# Altium PCB PCB_MPPT_V1.0.PcbDoc
Units mm, origin at the board's own origin, x right, y up, seen from the top; angles counter-clockwise.
Board outline 99.06 x 66 mm, 2 copper layers (Top Layer, Bottom Layer); 93 components, 51 nets, 264 pads, 192 vias.
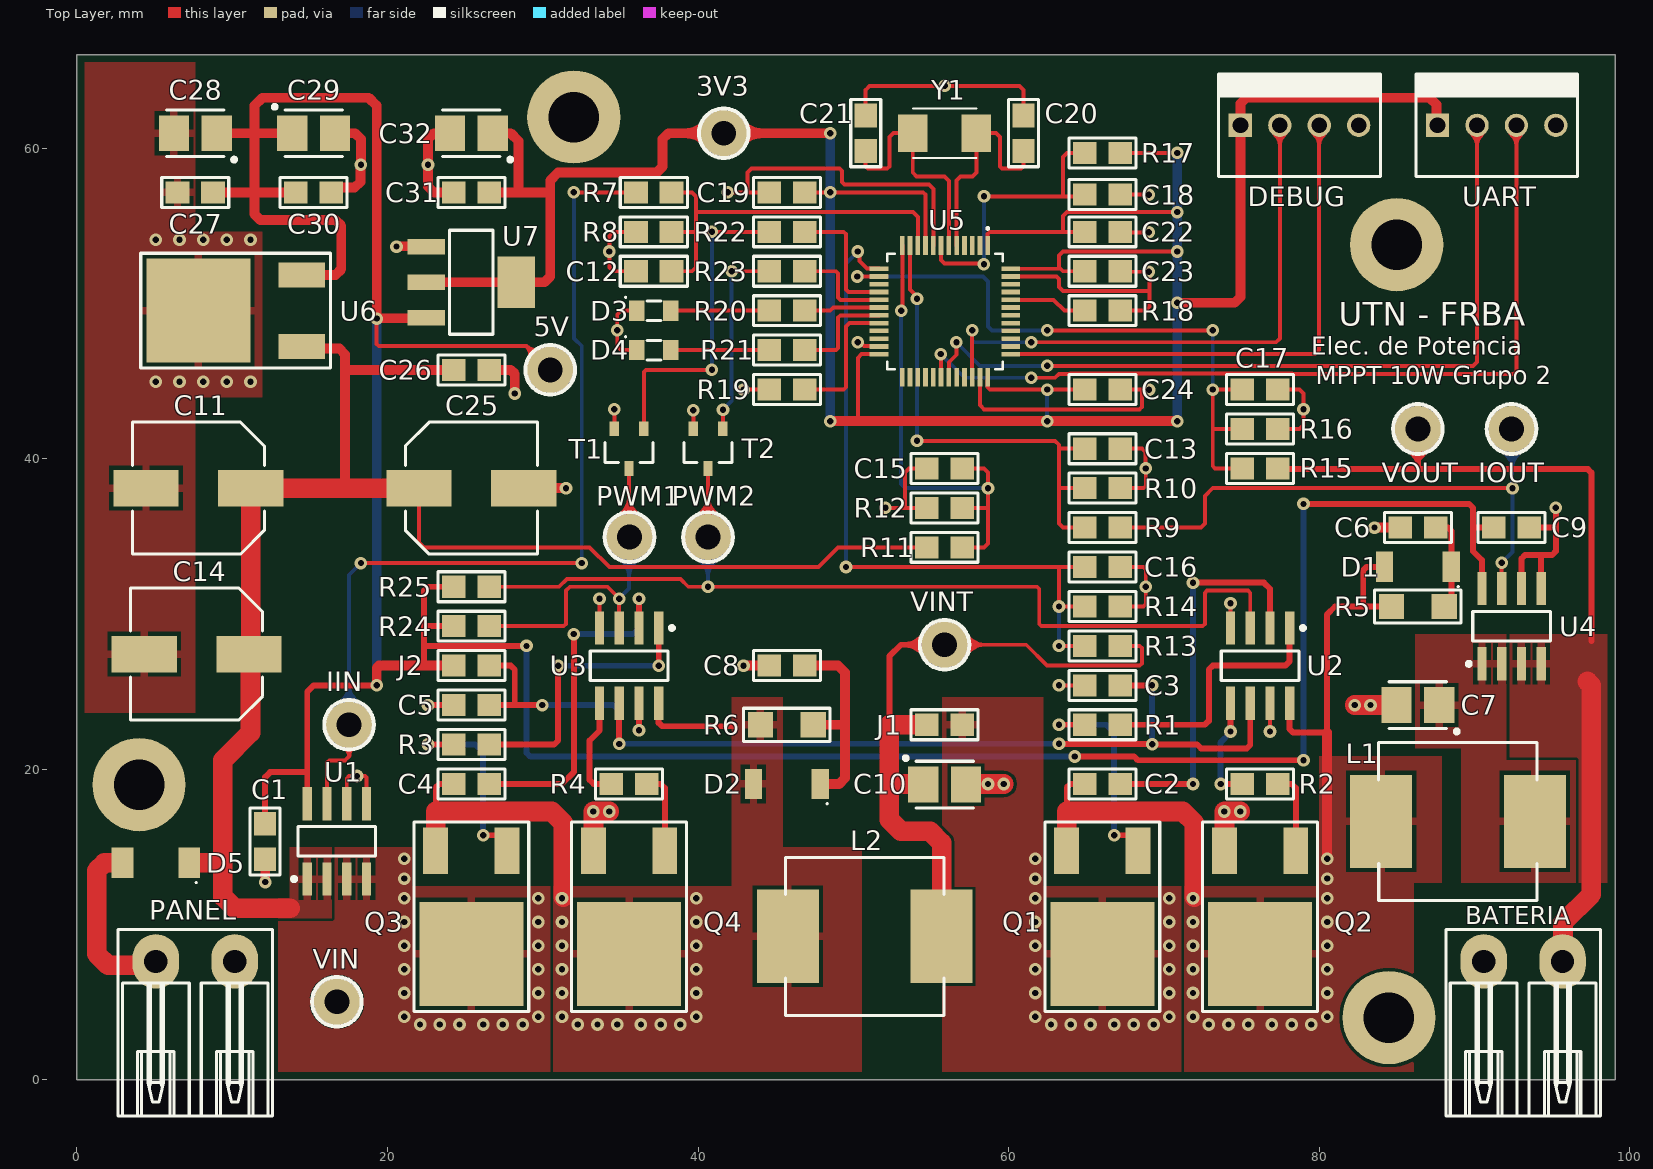
[diagram p0: Top Layer view]
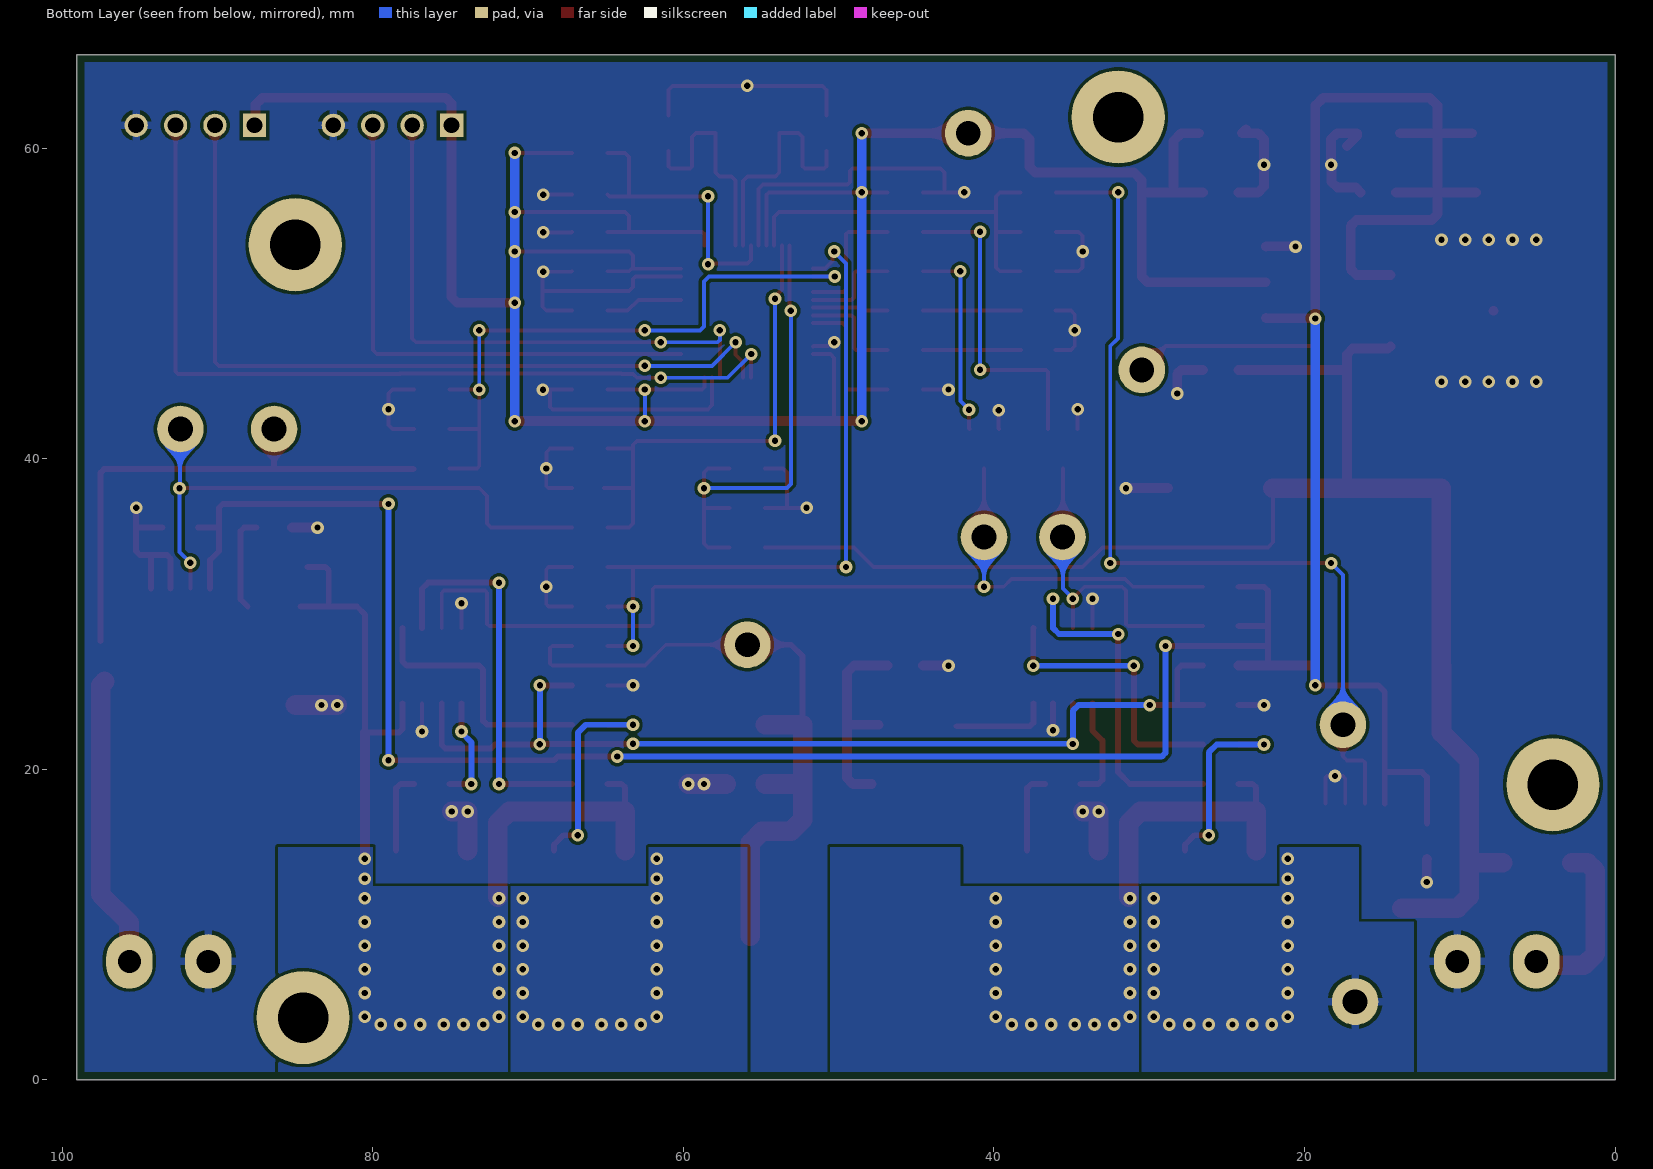
[diagram p1: Bottom Layer view, seen from below]

## Layer stack, top to bottom
Top Solder: solder mask 0.0102, Solder Resist, Dk 3.5
Top Layer: signal copper 0.0356
Dielectric 1: dielectric 0.32, FR-4, Dk 4.8
Bottom Layer: signal copper 0.0356
Bottom Solder: solder mask 0.0102, Solder Resist, Dk 3.5

## Board outline
0,0 0,66 99.06,66 99.06,0

## Design rules (kind name [scope] priority, off if disabled: settings)
Clearance [All] p1: gap=0.203 ignorepadtopadclearanceinfootprint=FALSE except(0: Arc-Hole Track-Hole SMDPad-Hole THPad-Hole Via-Hole Fill-Hole Poly-Hole Region-Hole Text-Hole; 0.178: SMDPad-SMDPad)
HoleSize [All] p1: absolutevalues=TRUE maxlimit=3.81 minlimit=0.254 maxpercent=80.000 minpercent=20.000
MinimumSolderMaskSliver [All] p1: minsoldermaskwidth=0.178
PolygonConnect [All] p1: connectstyle=Relief reliefconductorwidth=0.508 reliefentries=4 polygonreliefangle="90 Angle" airgapwidth=0.254
RoutingVias [All] p1: holewidth=0.406 width=0.813 viastyle="Through Hole" minholewidth=0.406 minwidth=0.813 maxholewidth=0.406 maxwidth=0.813
SilkToSilkClearance [All] p1: silktosilkclearance=0.127
SilkToSolderMaskClearance [IsPad] p1: minsilkscreentomaskgap=0 clearancetoexposedcopper=TRUE
SolderMaskExpansion [All] p1: expansion=0.102 istentingtop=FALSE
Width [All] p1: maxlimit=2.54 minlimit=0.203 preferedwidth=0.381
26 further rules are at their usual default settings.

## Classes and differential pairs
component class Designator: C18 C19 C20 C21 C22 C23 C24 D3 D4 DEBUG PWM1 PWM2 R17 R18 R19 R20 R21 R22 R23 R24 R25 T1 T2 U5 UART Y1

## Components (designator, comment, footprint, x,y, rotation, side; value= is the part's Value field where it differs from the comment)
3V3 "TP" TP_COMPACT 41.656,60.96 r0 top (schematic designator TP9)
5V "TP" TP_COMPACT 30.48,45.72 r0 top (schematic designator TP8)
BATERIA "CONN_02P" Bornera2_DegsonH 93.143,7.62 r0 top (schematic designator CN2)
C1 "100nF 50V X7R" 0805 12.121,15.349 r270 top
C2 "100nF 50V X7R" 0805 66.04,19.05 r0 top
C3 "100nF 50V X7R" 0805 66.04,25.4 r0 top
C4 "100nF 50V X7R" 0805 25.4,19.05 r0 top
C5 "100nF 50V X7R" 0805 25.4,24.13 r0 top
C6 "8.2nF 50V X7R" 0805 86.36,35.56 r180 top
C7 "10uF 35V Tantalio" CAPPOL1210 86.36,24.13 r180 top
C8 "8.2nF 50V X7R" 0805 45.72,26.67 r180 top
C9 "100nF 50V X7R" 0805 92.396,35.56 r0 top
C10 "10uF 35V Tantalio" CAPPOL1210 55.88,19.01 r0 top
C11 "100uF 50V Alum" CAPSMD8x8.3 7.822,38.1 r180 top
C12 "1nF 25V X7R" 0805 37.151,52.07 r180 top
C13 "1nF 25V X7R" 0805 66.04,40.64 r0 top
C14 "100uF 50V Alum" CAPSMD8x8.3 7.705,27.415 r180 top
C15 "1nF 25V X7R" 0805 55.88,39.37 r180 top
C16 "1nF 25V X7R" 0805 66.04,33.02 r0 top
C17 "1nF 25V X7R" 0805 76.2,44.45 r0 top
C18 "100nF 50V X7R" 0805 66.04,57.023 r180 top
C19 "100nF 50V X7R" 0805 45.72,57.15 r0 top
C20 "22pF 50V C0G/NP0" 0805 60.96,60.96 r90 top
C21 "22pF 50V C0G/NP0" 0805 50.8,60.96 r90 top
C22 "100nF 50V X7R" 0805 66.04,54.61 r180 top
C23 "100nF 50V X7R" 0805 66.04,52.07 r180 top
C24 "100nF 50V X7R" 0805 66.04,44.45 r180 top
C25 "100uF 50V Alum" CAPSMD8x8.3 25.4,38.1 r0 top
C26 "100nF 50V X7R" 0805 25.4,45.72 r0 top
C27 "100nF 50V X7R" 0805 7.62,57.15 r180 top
C28 "10uF 35V Tantalio" CAPPOL1210 7.62,60.96 r180 top
C29 "10uF 35V Tantalio" CAPPOL1210 15.24,60.96 r0 top
C30 "100nF 50V X7R" 0805 15.24,57.15 r180 top
C31 "100nF 50V X7R" 0805 25.4,57.15 r180 top
C32 "10uF 35V Tantalio" CAPPOL1210 25.4,60.96 r180 top
D1 "PMEG3050EP" SOD-128#1 86.36,33.033 r180 top
D2 "PMEG3050EP" SOD-128#1 45.72,19.05 r180 top
D3 "VERDE 0805" LED0805 37.151,49.53 r0 top
D4 "ROJO 0805" LED0805 37.151,46.99 r0 top
D5 "PMEG3050EP" SOD-128#2 5.08,13.97 r180 top
DEBUG "CONN_04P" "MOLEX4 - 0.1\"" 74.93,61.468 r0 top (schematic designator CN3)
IIN "TP" TP_COMPACT 17.526,22.86 r0 top (schematic designator TP1)
IOUT "TP" TP_COMPACT 92.396,41.91 r0 top (schematic designator TP5)
J1 "JUMPER" 0805 55.88,22.86 r180 top
J2 "JUMPER" 0805 25.4,26.67 r0 top
L1 "SRP1050WA-101M" SRP1050WA 88.944,16.637 r0 top
L2 "SRP1050WA-101M" SRP1050WA 50.742,9.239 r0 top
PANEL "CONN_02P" Bornera2_DegsonH 7.62,7.62 r0 top (schematic designator CN1)
PWM1 "TP" TP_COMPACT 35.587,34.952 r0 top (schematic designator TP6)
PWM2 "TP" TP_COMPACT 40.64,34.952 r0 top (schematic designator TP7)
Q1 "IRLML0040TRPBF" dpak 66.04,11.43 r180 top
Q2 "IRLML0040TRPBF" dpak 76.2,11.43 r180 top
Q3 "IRLML0040TRPBF" dpak 25.4,11.43 r180 top
Q4 "IRLML0040TRPBF" dpak 35.56,11.43 r180 top
R1 "22R 5% 1/8W" 0805 66.04,22.86 r0 top
R2 "22R 5% 1/8W" 0805 76.2,19.05 r180 top
R3 "22R 5% 1/8W" 0805 25.4,21.59 r0 top
R4 "22R 5% 1/8W" 0805 35.56,19.05 r180 top
R5 "33 5% 1/2W" 1206 86.36,30.48 r180 top
R6 "33 5% 1/2W" 1206 45.72,22.86 r180 top
R7 "10K 1% 1/8W" 0805 37.151,57.15 r180 top
R8 "10K 1% 1/8W" 0805 37.151,54.61 r0 top
R9 "10K 1% 1/8W" 0805 66.04,35.56 r0 top
R10 "10K 1% 1/8W" 0805 66.04,38.1 r180 top
R11 "68K 1% 1/8W" 0805 55.88,34.29 r180 top
R12 "10K 1% 1/8W" 0805 55.88,36.83 r0 top
R13 "68K 1% 1/8W" 0805 66.04,27.94 r0 top
R14 "10K 1% 1/8W" 0805 66.04,30.48 r180 top
R15 "10K 1% 1/8W" 0805 76.2,39.37 r0 top
R16 "10K 1% 1/8W" 0805 76.2,41.91 r180 top
R17 "10K 1% 1/8W" 0805 66.04,59.69 r0 top
R18 "10K 1% 1/8W" 0805 66.04,49.53 r180 top
R19 "10K 1% 1/8W" 0805 45.72,44.45 r180 top
R20 "330R 5% 1/8W" 0805 45.72,49.53 r180 top
R21 "330R 5% 1/8W" 0805 45.72,46.99 r180 top
R22 "10K 1% 1/8W" 0805 45.72,54.61 r180 top
R23 "10K 1% 1/8W" 0805 45.72,52.07 r180 top
R24 "10K 1% 1/8W" 0805 25.4,29.21 r180 top
R25 "10K 1% 1/8W" 0805 25.4,31.75 r180 top
T1 "BC817" SOT23 36.51,41.92 r180 top
T2 "BC817" SOT23 41.59,41.92 r180 top
U1 "TMCS1108A4BQDR" SO8 16.74,15.349 r90 top
U2 "MCP14628" SO8 76.2,26.67 r270 top
U3 "MCP14628" SO8 35.56,26.67 r270 top
U4 "TMCS1108A4BQDR" SO8 92.396,29.21 r90 top
U5 "STM32F103" "LQFP48 - 7x7" 55.88,49.53 r270 top
U6 "MC7805CDTRKG" dpak 11.147,49.53 r90 top
U7 "SPX1117M3-L-3-3/TR" SOT223 25.4,51.36 r270 top
UART "CONN_04P" "MOLEX4 - 0.1\"" 87.63,61.468 r0 top (schematic designator CN4)
VIN "TP" TP_COMPACT 16.74,5.023 r0 top (schematic designator TP2)
VINT "TP" TP_COMPACT 55.88,28.015 r0 top (schematic designator TP4)
VOUT "TP" TP_COMPACT 86.36,41.91 r0 top (schematic designator TP3)
Y1 "ECS-80-12-30Q-DS-TR" "ECS 2-SMD" 55.88,60.96 r0 top

## Footprints (in the part's own frame and the unit in brackets; to place one, negate y for a bottom-side part, rotate by r counter-clockwise, add the part's x,y. Pads: shape width x height; smd on the part's side, far side on the other; paste and mask are expansions set on the pad)
0805 [mil] "Pasivo 0805"
  rect 60x56 smd: 1(-45,0) 2(45,0)
  silkscreen extent -85,-38 85,38, body extent -39,-24 39,25, height 15
1206 [mil] "Pasivo 1206"
  rect 64x64 smd: 1(-67,0) 2(67,0)
  silkscreen extent -109,-42 110,42, body extent -62,-31 63,31, height 20
Bornera2_DegsonH [mm]
  oval 3x3.5 hole 1.5: 1(-2.54,0) 2(2.54,0)
  silkscreen extent -4.98,-9.95 4.98,2.05, body extent -5.08,-10.3 5.08,1.8, height 8.2
CAPPOL1210 [mm] "Molded Capacitor, 2-Leads, Body 3,50x2,85mm, IPC Medium Density"
  rect 1.95x2.3 smd: 1(-1.375,0) 2(1.375,0)
  silkscreen extent -2.63,-1.5 1.85,1.82, body extent -1.85,-1.5 1.85,1.5, height 2.1
CAPSMD8x8.3 [mm] "Aluminum Electrolytic Capacitor, Body 8,30x8,30x10,00mm, IPC Low Density"
  rect 4.2x2.35 smd: 1(-3.375,0) 2(3.375,0)
  silkscreen extent -4.25,-4.25 4.25,4.25, body extent -4.35,-4.25 4.35,4.25, height 10
dpak [mm]
  rect 1.6x3 smd: 1(-2.3,-3.325) 3(2.3,-3.325)
  rect 6.7x6.7 smd: 2(0,3.325)
  silkscreen extent -3.7,-5.18 3.7,7.04, body extent -3.28,-4.18 3.26,5.76, height 2.36
"ECS 2-SMD" [mm]
  rect 1.9x2.4 smd: 1(-2.05,0) 2(2.05,0)
  silkscreen extent -2.05,-1.6 2.05,1.6
LED0805 [mm]
  rect 1x1.3 smd: A(1.1,0) K(-1.1,0)
  silkscreen extent -1.86,-0.63 0.45,0.91, body extent -1.1,-0.65 1.1,0.65, height 1
"LQFP48 - 7x7" [mil]
  rect 47x12 smd paste+0 mask+0: 1(-165.32,109.27) 2(-165.32,89.58) 3(-165.32,69.9) 4(-165.32,50.21) 5(-165.32,30.53) 6(-165.32,10.84) 7(-165.32,-8.84) 8(-165.32,-28.53) 9(-165.32,-48.21) 10(-165.32,-67.9) 11(-165.32,-87.58) 12(-165.32,-107.27) 25(169.32,-107.27) 26(169.32,-87.58) 27(169.32,-67.9) 28(169.32,-48.21) 29(169.32,-28.53) 30(169.32,-8.84) 31(169.32,10.84) 32(169.32,30.53) 33(169.32,50.21) 34(169.32,69.9) 35(169.32,89.58) 36(169.32,109.27)
  rect 12x47 smd paste+0 mask+0: 13(-106.27,-166.32) 14(-86.58,-166.32) 15(-66.9,-166.32) 16(-47.21,-166.32) 17(-27.53,-166.32) 18(-7.84,-166.32) 19(11.84,-166.32) 20(31.53,-166.32) 21(51.21,-166.32) 22(70.9,-166.32) 23(90.58,-166.32) 24(110.27,-166.32) 37(110.27,168.32) 38(90.58,168.32) 39(70.9,168.32) 40(51.21,168.32) 41(31.53,168.32) 42(11.84,168.32) 43(-7.84,168.32) 44(-27.53,168.32) 45(-47.21,168.32) 46(-66.9,168.32) 47(-86.58,168.32) 48(-106.27,168.32)
  silkscreen extent -212,-146 149,148, body extent -175,-176 179,178, height 28
"MOLEX4 - 0.1\"" [mm]
  rect 1.5x1.5 hole 1.016: 1(0,0)
  round 1.5 hole 1.016: 2(2.54,0) 3(5.08,0) 4(7.62,0)
  silkscreen extent -1.4,-3.3 9.02,3.3, body extent -1.27,-3.17 8.89,3.18, height 10.74
SO8 [mm]
  rect 2.15x0.6 smd: 1(-2.425,1.905) 2(-2.425,0.635) 3(-2.425,-0.635) 4(-2.425,-1.905) 5(2.425,-1.905) 6(2.425,-0.635) 7(2.425,0.635) 8(2.425,1.905)
  silkscreen extent -2.55,-2.5 0.95,2.88, body extent -3.01,-2.51 3.01,2.49, height 1.75
SOD-128#1 [mm] "SODFL, 2-Leads, Body 2,50x4,70mm, IPC Medium Density"
  rect 1.1x1.95 smd: 1(2.15,0) 2(-2.15,0)
  silkscreen extent -2.65,1.23 -2.55,1.32, body extent -2.35,-1.35 2.35,1.35, height 1.1
SOD-128#2 [mm] "SODFL, 2-Leads, Body 2,50x4,70mm, IPC Medium Density"
  rect 1.4x1.95 smd: 1(2.15,0) 2(-2.15,0)
  silkscreen extent -2.65,1.23 -2.55,1.32, body extent -2.35,-1.35 2.35,1.35, height 1.1
SOT23 [mm]
  rect 0.6x0.95 smd: 1(0,0) 2(0.95,2.55) 3(1.9,0)
  silkscreen extent -0.6,0.87 2.5,2.17, body extent -0.53,-0.25 2.47,2.88, height 1
SOT223 [mm] "SOT223"
  rect 1x2.4 smd: 1(-2.3,-2.9) 2(0,-2.9) 3(2.3,-2.9)
  rect 3.3x2.4 smd: 4(0,2.9)
  silkscreen extent -3.35,-1.4 3.35,1.4, body extent -3.25,-3.45 3.25,3.55, height 1.62
SRP1050WA [mm]
  rect 4x6 smd: 1(-4.95,0) 2(4.95,0)
  silkscreen extent -5.11,-5.1 5.1,5.08, body extent -5.5,-5 5.5,5, height 5.4
TP_COMPACT [mm] "Keystone 5006 type Testpoint"
  round 3 hole 1.6: 1(0,0)
  silkscreen extent -1.6,-1.6 1.6,1.6, body extent -1.59,-1.59 1.59,1.59, height 5.58

## Part data
BATERIA PANEL: "Connector Generic 2 Vias"
C1 C2 C3 C4 C5 C9 C18 C19 C20 C21 C22 C23 C24 C26 C27 C30 C31: library part CAP
C6 C8 C12 C13 C15 C16 C17: library part "Ceramic capacitor", "Ceramic Capacitor"
C7 C10 C28 C29 C32: library part CAPPOL, "TCJB106M035R0200"
C11 C14 C25: library part CAPPOL, "UWZ1H101MCL1GS"
D1 D2 D5: library part DIODO_SH, "Diode Shottky"
D3 D4: library part Led
DEBUG UART: "Connector Generic 4 Vias"
L1 L2: library part IND, "Inductor"
Q1 Q2 Q3 Q4: library part N_MOSFET_SOT23, "Mosfet N-Ch"
R1 R2 R3 R4 R5 R6: library part Res1, "Resistor"
R7 R8 R9 R10 R11 R12 R13 R14 R15 R16 R17 R18 R19 R20 R21 R22 R23 R24 R25: library part RES
T1 T2: library part "TRANSISTOR NPN"
U1 U4: library part TMCS1108, Supplier Part Number 1=296-TMCS1108A4BQDRCT-ND, Supplier 1=Digi-Key
U6: library part LM78XX
U7: library part LIN_REG
Y1: library part CRISTAL

## Free pads (board coordinates)
  round 6 hole 3.25 unplated: ""(4,19) ""(32,62) ""(84.5,4) ""(85,53.778)

## Via types
v1: diameter 0.813, hole 0.406, Top Layer to Bottom Layer, tented both sides, 192 vias

## Nets (pads, with @x,y where several pads share a name; then routed paths per layer and width w, separated by ;. In a path a pad name is that pad's centre, name@x,y a point inside that pad or via, vN(x,y) a via of type N, cw(c..) or ccw(c..) an arc to the next point about the centre after c; other vN are vias at no path point)
3V3: 3V3.1 C19.2 C22.2 C23.2 C24.2 C31.1 C32.1 DEBUG.1 R17.2 U5.1 U5.9 U5.24 U5.36 U5.48 U7.2 U7.4 UART.1 | length 190.9
  Top Layer w0.254: C19.2 v1(48.514,57.15) 54.507,57.15 54.655,57.001 U5.9 ; 50.292,42.418 50.292,46.482 50.539,46.729 U5.24 ; U5.36 58.655,44.599 58.804,44.45 v1(62.484,44.45) C24.2 ; U5.1 58.655,54.461 58.804,54.61 63.5,54.61 ; U5.48 63.246,52.229 ; C23.2 63.5,52.07 63.341,52.229 63.246,52.229 ; C22.2 63.5,54.61 ; R17.2 v1(70.866,59.69) ; v1(70.866,53.34) 63.5,53.34 63.246,53.086 63.246,52.229 ; v1(70.866,55.88) 63.754,55.88 63.5,55.626 63.5,54.61
  Top Layer w0.635: U7.2 U7.4 30.108,51.36 30.48,51.732 30.48,57.15 ; C31.1 28.448,57.15 ; C32.1 27.94,60.96 28.448,60.452 28.448,57.15 ; 3V3.1@41.469,60.96 38.1,60.96 37.719,60.579 37.719,58.801 37.338,58.42 30.988,58.42 30.48,57.912 30.48,57.15 ; 3V3.1@41.977,60.96 v1(48.514,60.96) ; v1(48.514,42.418) 50.292,42.418 v1(62.484,42.418) v1(70.866,42.418) ; v1(70.866,50.038) 74.558,50.038 74.744,50.224 74.93,50.41 74.93,62.874 75.302,63.246 87.122,63.246 87.569,62.799 87.569,61.529 UART.1 ; 28.448,57.15 30.48,57.15
  Bottom Layer w0.254: v1(62.484,42.418) v1(62.484,44.45) ; DEBUG.1@74.791,61.468 DEBUG.1@74.93,61.329
  Bottom Layer w0.635: v1(48.514,42.418) v1(48.514,57.15) v1(48.514,60.96) ; v1(70.866,42.418) v1(70.866,50.038) v1(70.866,53.34) v1(70.866,55.88) v1(70.866,59.69)
5V: 5V.1 C1.1 C9.1 C27.1 C28.1 C29.1 C30.2 J2.1 R24.2 R25.2 U1.8 U4.8 U6.3 U7.3 | length 221.2
  Top Layer w0.254: v1(19.304,49.022) 19.304,47.393 19.453,47.244 28.956,47.244 5V.1
  Top Layer w0.381: C1.1 12.121,19.487 12.446,19.812 14.732,19.812 ; U1.8 14.835,24.995 15.24,25.4 v1(19.304,25.4) ; 22.098,26.67 22.352,26.924 22.352,27.94 ; R24.2 22.352,29.21 ; R25.2 22.606,31.75 22.352,31.496 22.352,29.21 ; v1(28.956,27.94) 22.352,27.94 ; v1(64.262,20.815) 68.085,20.815 68.326,20.574 v1(78.994,20.574) ; v1(78.994,37.084) 89.662,37.084 89.916,36.83 89.916,35.56 ; U4.8 90.491,33.461 89.916,34.036 89.916,35.56 ; C9.1 89.916,35.56 ; 22.352,27.94 22.352,29.21
  Top Layer w0.635: C27.1@8.965,57.15 11.43,57.15 ; C28.1@9.197,60.96 11.43,60.96 ; C29.1 11.43,60.96 ; C30.2 11.43,57.15 ; U6.3 16.646,51.83 17.018,52.202 17.018,55 16.646,55.372 11.802,55.372 11.43,55.744 11.43,57.15 ; v1(19.304,25.4) 19.304,26.521 19.453,26.67 22.098,26.67 J2.1 ; U7.3 22.481,49.041 19.323,49.041 v1(19.304,49.022) 19.304,62.738 18.796,63.246 11.938,63.246 11.43,62.738 11.43,60.96 ; 11.43,57.15 11.43,60.96
  Bottom Layer w0.381: v1(28.956,27.94) 28.956,21.051 29.198,20.809 64.256,20.809 v1(64.262,20.815) ; v1(78.994,20.574) v1(78.994,37.084)
  Bottom Layer w0.635: v1(19.304,25.4) v1(19.304,49.022)
5VD: C3.2 C5.2 J2.2 U2.6 U3.6 | length 66.8
  Top Layer w0.381: C5.2 28.194,24.13 ; J2.2 27.94,26.67 28.194,26.416 28.194,24.13 ; v1(29.972,24.13) 28.194,24.13 ; v1@34.918,21.628 34.922,21.632 34.922,24.242 U3.6 ; v1(63.246,21.647) 63.269,21.624 69.226,21.624 v1(69.249,21.601) 72.135,21.601 72.4,21.336 75.342,21.336 75.565,21.559 U2.6 ; C3.2 67.185,25.398 v1(69.242,25.398)
  Bottom Layer w0.381: v1(29.972,24.13) 34.544,24.13 34.918,23.756 34.918,21.591 34.964,21.638 63.236,21.638 v1(63.246,21.647) ; v1(69.242,25.398) 69.246,25.394 69.246,21.605 v1(69.249,21.601)
  other v1: 34.925,21.628
GND: BATERIA.1 C1.2 C3.1 C5.1 C6.2 C7.2 C8.2 C9.2 C10.2 C11.2 C12.2 C13.2 C14.2 C15.2 C16.2 C17.2 C18.1 C19.1 C20.2 C21.2 C22.1 C23.1 C24.1 C25.2 C26.2 C27.2 C28.2 C29.2 C30.1 C31.2 C32.2 D3.K D4.K DEBUG.4 PANEL.2 Q2.3 Q4.3 R8.1 R10.1 R12.1 R14.1 R16.1 R18.1 R19.2 T1.3 T2.3 U1.5 U1.6 U2.4 U2.7 U3.4 U3.7 U4.5 U4.6 U5.8 U5.23 U5.35 U5.47 U6.2 U7.1 UART.4 | length 173.8
  Top Layer w0.254: U1.6 17.375,19.407 17.526,19.558 v1(18.034,19.558) 18.542,19.558 18.645,19.455 U1.5 ; Q4.3 Q4.3@33.274,14.769 ; v1@33.627,30.94 33.641,30.926 33.641,29.109 U3.4 ; T1.3 v1(34.61,43.173) ; C12.2 34.544,52.07 34.29,52.324 v1(34.29,53.34) 34.29,54.356 34.544,54.61 R8.1 ; D4.K 35.052,46.99 34.798,47.244 v1(34.798,48.26) 34.798,49.276 35.052,49.53 D3.K ; T2.3 39.696,41.926 39.696,43.106 v1(39.701,43.112) ; v1(41.91,57.15) 43.18,57.15 ; v1(42.926,44.45) R19.2 ; C19.1 43.18,57.15 ; v1(50.292,47.498) 50.443,47.498 50.695,47.247 51.638,47.247 U5.23 ; C21.2 50.8,63.754 51.054,64.008 v1(55.88,64.008) 60.706,64.008 60.96,63.754 C20.2 ; v1(52.07,36.83) 53.34,36.83 ; R12.1 53.34,36.83 ; C15.2 53.594,39.37 53.34,39.116 53.34,36.83 ; U5.8 55.155,57.367 54.864,57.658 49.425,57.658 49.276,57.807 49.276,58.525 49.127,58.674 43.434,58.674 43.18,58.42 43.18,57.15 ; U5.35 58.155,43.445 58.42,43.18 68.431,43.18 68.58,43.329 68.58,44.45 ; U5.47 63.079,51.729 63.246,51.562 63.246,51.054 63.5,50.8 69.088,50.8 ; v1(63.246,25.4) C3.1 ; R14.1 68.685,30.48 68.834,30.629 v1(68.834,31.75) 68.834,32.871 68.685,33.02 C16.2 ; R10.1 68.685,38.1 68.834,38.249 v1(68.834,39.37) 68.809,39.395 68.809,40.411 68.58,40.64 C13.2 ; C24.1 68.58,44.45 ; R18.1 68.834,49.53 69.088,49.784 69.088,50.8 ; C23.1 67.216,52.037 v1(69.038,52.037) 69.088,51.987 69.088,50.8 ; C22.1 67.216,54.577 v1(69.038,54.577) ; C18.1 67.201,57.005 v1(69.026,57.005) ; v1(69.049,44.434) 69.033,44.45 68.58,44.45 ; Q2.3 Q2.3@73.914,14.769 ; U2.4 74.299,29.099 74.299,30.689 v1@74.303,30.693 ; U2.7 76.847,24.233 76.847,22.438 v1@76.858,22.427 ; R16.1 78.74,41.91 78.994,42.164 v1(78.994,43.18) 78.994,44.196 78.74,44.45 C17.2
  Top Layer w0.381: v1(22.606,24.13) C5.1 ; v1(36.195,22.514) U3.7 ; U4.6 93.031,33.559 93.254,33.782 94.301,33.782 ; C9.2 95.25,35.56 ; U4.5 94.301,33.782 ; v1(95.25,36.83) 95.25,35.56 ; 94.301,33.782 94.996,33.782 95.25,34.036 95.25,35.56
  Top Layer w0.635: C1.2 12.124,14.203 12.124,12.733 v1(12.127,12.73) ; C30.1 16.688,57.455 17.882,57.455 18.254,57.827 18.254,58.894 v1(18.288,58.928) 18.288,60.588 17.916,60.96 C29.2 16.615,60.785 C29.2@17.273,60.127 ; v1@20.582,53.705 20.605,53.682 22.478,53.682 U7.1 ; C32.2@23.771,61.214 C32.2 22.978,60.96 22.606,60.588 v1(22.606,58.928) 22.606,57.522 22.978,57.15 C31.2 ; C26.2 27.94,45.72 28.194,45.466 v1(28.194,44.196) ; C25.2 v1(31.496,38.1) ; v1(42.926,26.67) C8.2 ; v1(83.566,35.56) C6.2
  Top Layer w1.27: Q4.3@33.274,14.769 33.274,17.272 v1(34.29,17.272) ; C10.2@57.255,19.05 v1(58.674,19.05) v1(59.69,19.05) ; Q2.3@73.914,14.769 73.914,17.272 v1(74.93,17.272) ; v1(82.296,24.13) C7.2
  other v1: 33.26,17.272 73.9,17.272 76.835,22.427 83.312,24.13 74.295,30.693 33.655,30.971 5.08,44.958 6.604,44.958 8.128,44.958 9.652,44.958 11.176,44.958 20.582,53.66 5.08,54.102 6.604,54.102 8.128,54.102 9.652,54.102 11.176,54.102
NetC2_1: C2.1 D1.1 L1.1 Q1.3 Q2.2 R5.2 U2.8 | length 46.6
  Top Layer w0.381: 63.754,17.272 63.754,18.827 63.977,19.05 C2.1 ; U2.8 78.105,22.575 78.328,22.352 80.518,22.352 80.518,29.972 81.026,30.48 82.842,30.48 ; D1.1 83.071,33.033 82.842,32.804 82.842,30.48 ; R5.2 82.842,30.48
  Top Layer w0.635: v1@80.518,14.272 80.518,22.352
  Top Layer w1.27: Q1.3 63.754,14.769 63.754,17.272 71.219,17.272 71.963,16.528 v1@71.963,11.765
  other v1: 72.898,3.556 74.168,3.556 75.438,3.556 76.962,3.556 78.232,3.556 79.502,3.556 71.882,4.064 80.518,4.064 71.882,5.588 80.518,5.588 71.882,7.112 80.518,7.112 71.882,8.636 80.518,8.636 71.882,10.16 80.518,10.16 71.882,11.684 80.518,11.684 80.518,12.954 80.518,14.224
NetC2_2: C2.2 U2.2 | length 25.3
  Top Layer w0.381: C2.2 v1(71.882,19.05) ; v1(71.882,32.004) 71.895,32.017 76.441,32.017 76.835,31.623 U2.2
  Bottom Layer w0.381: v1(71.882,19.05) v1(71.882,32.004)
NetC4_1: C4.1 D2.1 L2.1 Q3.3 Q4.2 R6.2 U3.8 | length 24.9
  Top Layer w0.381: 23.114,17.272 23.114,18.827 23.337,19.05 C4.1 ; U3.8 37.465,22.987 37.688,22.764 42.418,22.764
  Top Layer w1.27: Q3.3 23.114,14.769 23.114,17.272 30.577,17.272 31.321,16.528 v1@31.321,11.763
  other v1: 32.258,3.556 33.528,3.556 34.798,3.556 36.322,3.556 37.592,3.556 38.862,3.556 31.242,4.064 39.878,4.064 31.242,5.588 39.878,5.588 31.242,7.112 39.878,7.112 31.242,8.636 39.878,8.636 31.242,10.16 39.878,10.16 31.242,11.684 39.878,11.684
NetC4_2: C4.2 U3.2 | length 22.8
  Top Layer w0.381: C4.2 31.242,19.05 32.004,19.812 v1(32.004,28.702) ; v1@36.192,30.969 36.193,30.967 36.193,29.097 U3.2
  Bottom Layer w0.381: v1(32.004,28.702) 35.814,28.702 36.192,29.08 v1@36.192,30.969
  other v1: 36.195,30.971
NetC6_1: C6.1 D1.2 R5.1 | length 6.2
  Top Layer w0.381: C6.1 88.291,35.56 88.514,35.337 88.514,33.037 D1.2 88.514,33.028 88.514,30.932 R5.1
NetC7_1: C7.1 L1.2 U4.1 U4.2
NetC8_1: C8.1 D2.2 R6.1 | length 13.4
  Top Layer w0.635: C8.1 49.022,26.67 49.471,26.221 49.471,22.86 ; R6.1 49.471,22.86 ; D2.2 49.099,19.05 49.471,19.422 49.471,22.86
NetC12_1: C12.1 R7.1 R8.2 U5.10 | length 25.8
  Top Layer w0.254: C12.1 39.624,52.07 39.878,52.324 39.878,54.61 ; R8.2 39.878,54.61 ; R7.1 39.624,57.15 39.878,56.896 39.878,55.88 ; U5.10 54.155,55.573 53.848,55.88 39.878,55.88 ; 39.878,54.61 39.878,55.88
NetC13_1: C13.1 R9.1 R10.2 U5.11 | length 32.4
  Top Layer w0.254: U5.11 53.655,50.89 54.102,50.443 v1(54.102,50.292) ; v1(54.102,41.148) 62.992,41.148 63.246,40.894 63.246,40.64 ; R9.1 63.5,35.56 63.246,35.814 63.246,38.1 ; C13.1 63.246,40.64 ; R10.2@65.122,38.1 63.246,38.1 ; 63.246,38.1 63.246,40.64
  Bottom Layer w0.254: v1(54.102,41.148) v1(54.102,50.292)
NetC15_1: C15.1 R11.1 R12.2 U5.12 | length 30.8
  Top Layer w0.254: v1(53.086,49.53) 53.155,49.599 U5.12 ; R11.1 58.42,34.29 58.674,34.544 58.674,36.83 ; R12.2 58.674,36.83 ; C15.1 58.42,39.37 58.674,39.116 v1(58.674,38.1) 58.674,36.83
  Bottom Layer w0.254: v1(53.086,49.53) 53.086,38.354 53.34,38.1 v1(58.674,38.1)
NetC16_1: C16.1 R13.1 R14.2 U5.13 | length 46.6
  Top Layer w0.254: v1(49.53,33.02) 63.246,33.02 ; v1(50.292,53.34) 50.399,53.233 50.399,52.725 50.885,52.239 51.646,52.239 U5.13 ; v1(63.246,27.94) R13.1 ; R14.2@64.834,30.416 R14.2 v1(63.246,30.48) 63.246,33.02 ; C16.1 63.246,33.02
  Bottom Layer w0.254: v1(49.53,33.02) 49.53,42.65 49.517,42.663 49.517,52.565 v1(50.292,53.34) ; v1(63.246,27.94) v1(63.246,30.48)
NetC17_1: C17.1 R15.1 R16.2 U5.14 | length 42
  Top Layer w0.254: v1(50.254,51.73) U5.14 ; v1(62.484,48.26) v1(73.152,48.26) ; R15.1 73.301,39.37 73.152,39.519 73.152,41.91 ; R16.2 73.152,41.91 ; C17.1 v1(73.152,44.45) 73.152,41.91
  Bottom Layer w0.254: v1(50.254,51.73) 58.358,51.73 58.674,51.413 58.674,48.514 58.928,48.26 v1(62.484,48.26) ; v1(73.152,44.45) v1(73.152,48.26)
NetC20_1: C20.1 U5.5 Y1.2 | length 14.3
  Top Layer w0.254: U5.5 56.655,57.925 56.914,58.184 57.676,58.184 57.93,58.438 Y1.2 59.182,60.96 59.436,60.706 59.436,58.823 59.585,58.674 60.811,58.674 60.96,58.823 C20.1
NetC21_1: C21.1 U5.6 Y1.1 | length 15.4
  Top Layer w0.254: C21.1 50.8,58.823 50.949,58.674 52.175,58.674 52.324,58.823 52.324,60.706 52.578,60.96 Y1.1 53.83,58.438 54.084,58.184 55.862,58.184 56.155,57.891 U5.6
NetCN1_1: D5.1 PANEL.1 | length 11.3
  Top Layer w1.27: D5.1@2.794,13.97 1.778,13.97 1.27,13.462 1.27,8.11 2.014,7.366 4.826,7.366 PANEL.1
NetD3_A: D3.A R20.2 | length 6.3
  Top Layer w0.254: D3.A R20.2
NetD4_A: D4.A R21.2 | length 6.3
  Top Layer w0.254: D4.A R21.2
NetJ1_1: J1.1 Q1.2
  other v1: 62.738,3.556 64.008,3.556 65.278,3.556 66.802,3.556 68.072,3.556 69.342,3.556 61.722,4.064 70.358,4.064 61.722,5.588 70.358,5.588 61.722,7.112 70.358,7.112 61.722,8.636 70.358,8.636 61.722,10.16 70.358,10.16 61.722,11.684 70.358,11.684 61.722,12.954 61.722,14.224
NetQ1_1: Q1.1 R1.1 | length 14.2
  Top Layer w0.381: v1(63.246,22.86) R1.1 ; v1(66.802,15.748) 67.73,15.748 68.34,15.138 Q1.1
  Bottom Layer w0.381: v1(63.246,22.86) 66.294,22.86 66.802,22.352 v1(66.802,15.748)
NetQ2_1: Q2.1 R2.1 | length 5.3
  Top Layer w0.381: R2.1 78.232,19.05 78.5,18.782 Q2.1
NetQ3_1: Q3.1 R3.1 | length 12.9
  Top Layer w0.381: v1(22.606,21.59) R3.1 ; v1(26.162,15.748) 27.09,15.748 27.7,15.138 Q3.1
  Bottom Layer w0.381: v1(22.606,21.59) 25.654,21.59 26.162,21.082 v1(26.162,15.748)
NetQ3_2: Q3.2 U1.3 U1.4 VIN.1
  other v1: 22.098,3.556 23.368,3.556 24.638,3.556 26.162,3.556 27.432,3.556 28.702,3.556 21.082,4.064 29.718,4.064 21.082,5.588 29.718,5.588 21.082,7.112 29.718,7.112 21.082,8.636 29.718,8.636 21.082,10.16 29.718,10.16 21.082,11.684 29.718,11.684 21.082,12.954 21.082,14.224
NetQ4_1: Q4.1 R4.1 | length 5.3
  Top Layer w0.381: R4.1 37.592,19.05 37.86,18.782 Q4.1
NetR1_2: R1.2 U2.1 | length 16.7
  Top Layer w0.381: R1.2 72.644,22.86 72.898,23.114 72.898,26.416 73.152,26.67 77.829,26.67 78.105,26.946 U2.1
NetR2_2: R2.2 U2.5 | length 6.9
  Top Layer w0.381: v1(73.66,19.05) R2.2 ; v1@74.266,22.453 74.281,22.467 74.281,24.231 U2.5
  Bottom Layer w0.381: v1(73.66,19.05) 73.66,21.729 74.266,22.336 v1@74.266,22.453
  other v1: 74.295,22.427
NetR3_2: R3.2 U3.1 | length 18.3
  Top Layer w0.381: R3.2 30.734,21.59 30.988,21.844 v1(30.988,26.67) ; U3.1 37.468,29.092 37.468,26.662 v1(37.471,26.659)
  Bottom Layer w0.381: v1(30.988,26.67) 30.993,26.665 37.466,26.665 v1(37.471,26.659)
NetR4_2: R4.2 U3.5 | length 6.7
  Top Layer w0.381: U3.5 33.655,22.479 33.02,21.844 33.02,19.304 33.274,19.05 R4.2
NetR7_2: IIN.1 R7.2 U1.7 | length 59.3
  Top Layer w0.254: U1.7 16.105,20.423 16.256,20.574 17.271,20.574 17.526,20.828 IIN.1 ; v1(18.288,33.274) v1(32.512,33.274) ; v1(32.004,57.15) R7.2
  Bottom Layer w0.254: IIN.1 17.526,32.512 v1(18.288,33.274) ; v1(32.004,57.15) 32.004,47.752 32.512,47.244 v1(32.512,33.274)
NetR9_2: IOUT.1 R9.2 U4.7 | length 38
  Top Layer w0.254: R9.2 72.39,35.56 72.644,35.814 72.644,37.592 73.152,38.1 v1(92.456,38.1) ; v1(91.758,33.296) 91.76,33.294 U4.7 U4.7
  Bottom Layer w0.254: v1(91.758,33.296) 92.456,33.993 v1(92.456,38.1) 92.426,38.13 92.426,41.88 IOUT.1
NetR18_2: R18.2 U5.44 | length 5
  Top Layer w0.254: U5.44 62.906,50.229 63.605,49.53 R18.2
NetR19_1: R19.1 U5.20 | length 8.9
  Top Layer w0.254: R19.1 49.381,44.45 49.53,44.599 49.53,48.514 49.745,48.729 U5.20
NetR20_1: R20.1 U5.18 | length 4.9
  Top Layer w0.254: R20.1 48.514,49.53 48.713,49.729 U5.18
NetR21_1: R21.1 U5.19 | length 6.9
  Top Layer w0.254: R21.1 48.873,46.99 49.022,47.139 49.022,49.08 49.171,49.229 U5.19
NetR22_1: R22.1 U5.16 | length 8.5
  Top Layer w0.254: R22.1 49.369,54.61 49.517,54.461 49.517,50.891 49.679,50.729 U5.16
NetR22_2: R22.2 T1.1 | length 20.7
  Top Layer w0.254: T1.1 36.51,45.571 36.659,45.72 v1(40.894,45.72) ; v1(40.894,54.61) R22.2
  Bottom Layer w0.254: v1(40.894,45.72) v1(40.894,54.61)
NetR23_1: R23.1 U5.17 | length 6.5
  Top Layer w0.254: R23.1 48.873,52.07 49.022,51.921 49.022,50.378 49.171,50.229 U5.17
NetR23_2: R23.2 T2.1 | length 12.8
  Top Layer w0.254: T2.1 41.598,41.928 41.598,43.142 v1(41.605,43.149) ; v1(42.164,52.07) R23.2
  Bottom Layer w0.254: v1(41.605,43.149) 42.164,43.708 v1(42.164,52.07)
NetR24_1: PWM1.1 R24.1 T1.2 U3.3 | length 21.5
  Top Layer w0.254: R24.1 31.347,29.21 31.496,29.359 31.496,31.496 31.75,31.75 34.167,31.75 v1@34.893,31.024 ; v1@34.909,31.008 34.909,29.111 U3.3 ; T1.2 35.56,34.979 PWM1.1
  Bottom Layer w0.254: v1@34.893,30.971 v1@34.934,30.971 ; v1@34.934,31.024 35.56,31.65 35.56,34.925 PWM1.1
  other v1: 34.925,30.971
NetR25_1: PWM2.1 R25.1 T2.2 U2.3 | length 63.9
  Top Layer w0.254: R25.1 31.039,31.75 31.547,32.258 38.862,32.258 39.37,31.75 v1(40.64,31.75) 61.827,31.75 61.976,31.601 61.976,29.359 62.125,29.21 72.495,29.21 72.644,29.359 72.644,31.347 72.793,31.496 75.416,31.496 75.565,31.347 U2.3 ; PWM2.1 T2.2
  Bottom Layer w0.254: v1(40.64,31.75) PWM2.1
RESET: C18.2 R17.1 U5.7 | length 18.7
  Top Layer w0.254: U5.7 55.655,52.803 55.88,52.578 58.364,52.578 v1(58.413,52.529) ; v1(58.42,56.896) 63.5,56.896 ; C18.2 64.77,56.896 63.5,56.896 ; R17.1 63.754,59.69 63.5,59.436 63.5,56.896
  Bottom Layer w0.254: v1(58.413,52.529) 58.416,52.533 58.416,56.892 v1(58.42,56.896)
SWDCK: DEBUG.3 U5.37 | length 34.4
  Top Layer w0.254: U5.37 60.159,46.733 79.753,46.733 80.007,46.987 80.007,61.465 DEBUG.3
SWDIO: DEBUG.2 U5.34 | length 37.3
  Top Layer w0.254: U5.34 U5.34 57.657,48.259 v1(57.658,48.26) ; v1(61.468,47.498) 77.216,47.498 77.47,47.752 DEBUG.2
  Bottom Layer w0.254: v1(57.658,48.26) 57.658,47.647 57.807,47.498 v1(61.468,47.498)
UART_RX: U5.31 UART.2 | length 52
  Top Layer w0.254: U5.31 56.155,46.207 56.642,46.694 v1(56.642,47.498) ; v1(62.484,45.974) 89.916,45.974 90.17,46.228 UART.2
  Bottom Layer w0.254: v1(56.642,47.498) 58.166,45.974 v1(62.484,45.974)
UART_TX: U5.30 UART.3 | length 55.3
  Top Layer w0.254: v1(55.626,46.736) 55.641,46.721 55.641,45.244 U5.30 U5.30@55.641,45.214 ; v1(61.468,45.212) 62.992,45.212 63.246,45.466 63.973,45.466 63.998,45.491 78.242,45.491 78.267,45.466 92.561,45.466 92.71,45.615 UART.3
  Bottom Layer w0.254: v1(55.626,46.736) 57.15,45.212 v1(61.468,45.212)
V_INTERM: C10.1 J1.2 L2.2 R13.2 VINT.1 | length 45
  Top Layer w0.254: VINT.1 61.139,28.015 62.484,26.67 68.431,26.67 68.58,26.819 68.58,27.791 68.431,27.94 R13.2
  Top Layer w0.381: 52.324,22.86 52.324,27.271 53.068,28.015 VINT.1
  Top Layer w1.27: C10.1@54.737,19.05 52.324,19.05 ; J1.2 52.324,22.86 52.324,19.05 ; L2.2 55.692,15.258 54.948,16.002 53.068,16.002 52.324,16.746 52.324,19.05
V_OUT: BATERIA.2 R15.2 U4.3 U4.4 VOUT.1 | length 52.6
  Top Layer w0.254: R15.2 R15.2@77.39,39.323
  Top Layer w0.381: R15.2@77.39,39.323 86.36,39.323 ; VOUT.1 86.36,39.323 ; 97.536,28.249 97.536,39.1 97.313,39.323 86.36,39.323
  Top Layer w1.27: BATERIA.2 95.713,7.65 95.713,10.115 97.536,11.938 97.536,25.4 97.282,25.654
V_PANEL: C11.1 C14.1 C25.1 C26.1 D5.2 R11.2 U1.1 U1.2 U6.1 | length 100.7
  Top Layer w0.254: C25.1 22.025,34.617 22.352,34.29 33.02,34.29 34.29,33.02 47.752,33.02 49.022,34.29 R11.2
  Top Layer w0.635: U6.1 14.618,47.084 16.9,47.084 17.272,46.712 17.272,45.72 ; 17.272,38.1 17.272,45.72 ; C26.1 17.272,45.72
  Top Layer w1.27: D5.2 9.398,13.97 ; 13.716,11.049 10.142,11.049 9.398,11.793 9.398,13.97 ; C25.1 17.272,38.1 C11.1 11.197,26.67 11.176,26.649 11.176,22.352 9.398,20.574 9.398,13.97
pads on no net: U5.2 U5.3 U5.4 U5.15 U5.21 U5.22 U5.25 U5.26 U5.27 U5.28 U5.29 U5.32 U5.33 U5.38 U5.39 U5.40 U5.41 U5.42 U5.43 U5.45 U5.46

## Polygon pours and split planes (outlines as drawn)
NetC2_1 on Top Layer "NETC2_1_L01_P011" (solid, pour order 11): 71.12,12.446 80.01,12.446 80.01,20.828 87.884,20.828 87.884,12.7 86.106,12.7 86.106,0.508 71.12,0.508
NetJ1_1 on Top Layer "NETJ1_1_L01_P007" (solid, pour order 7): 55.741,24.638 62.23,24.638 62.23,14.986 62.23,12.446 71.12,12.446 71.12,0.508 55.741,0.508
V_OUT on Top Layer "V_OUT_L01_P017" (solid, pour order 17): 92.276,28.702 98.552,28.702 98.552,12.7 92.276,12.7
NetC7_1 on Top Layer "NETC7_1_L01_P016" (solid, pour order 16): 86.196,28.702 92.047,28.702 92.047,20.574 96.52,20.574 96.52,12.7 89.154,12.7 89.154,21.336 86.196,21.336
NetC4_1 on Top Layer "NETC4_1_L01_P008" (solid, pour order 8): 32.004,12.446 42.164,12.446 42.164,24.638 45.466,24.638 45.466,14.986 50.546,14.986 50.546,0.508 30.687,0.508 30.687,12.446
GND on Top Layer "GND_L01_P003" (solid, pour order 3): 11.938,54.61 11.938,43.942 7.62,43.942 7.62,23.622 0.508,23.622 0.508,65.532 7.62,65.532 7.62,54.61
NetQ3_2 on Top Layer "NETQ3_2_L01_P002" (solid, pour order 2): 16.612,14.986 21.59,14.986 21.59,12.446 30.48,12.446 30.48,0.508 12.954,0.508 12.954,10.414 16.612,10.414
V_PANEL on Top Layer "V_PANEL_L01_P000" (solid, pour order 0): 13.716,14.986 16.398,14.986 16.398,10.414 12.954,10.414 12.954,11.684 13.716,11.684
GND on Bottom Layer "GND_L02_P015" (solid, remove dead copper, pour order 15): 0.508,65.532 0.508,0.508 98.552,0.508 98.552,65.532
NetC2_1 on Bottom Layer "NETC2_1_L02_P012" (solid, pour order 12): 71.12,12.446 80.01,12.446 80.01,14.986 86.106,14.986 86.106,0.508 71.12,0.508
NetJ1_1 on Bottom Layer "NETJ1_1_L02_P010" (solid, pour order 10): 55.88,0.508 55.88,14.986 62.23,14.986 62.23,12.446 71.12,12.446 71.12,0.508
NetC4_1 on Bottom Layer "NETC4_1_L02_P009" (solid, pour order 9): 30.688,12.446 30.858,12.446 42.164,12.446 42.164,14.986 50.546,14.986 50.546,0.508 30.688,0.508
NetQ3_2 on Bottom Layer "NETQ3_2_L02_P004" (solid, pour order 4): 16.51,14.986 21.59,14.986 21.59,12.446 30.48,12.446 30.48,0.508 12.954,0.508 12.954,10.16 16.51,10.16

## Silkscreen, mask and mechanical layers (free items; w line width, h text height)
Top Overlay:
  text "UTN - FRBA" at 81.28,48.565 h1.52
  text "Elec. de Potencia" at 79.503,46.685 h1.14
  text "MPPT 10W Grupo 2" at 79.788,44.78 h1.14
Mechanical 1:
  the board outline again, w0.254